# EAGLE board drinkshield02 (EAGLE 5.11)
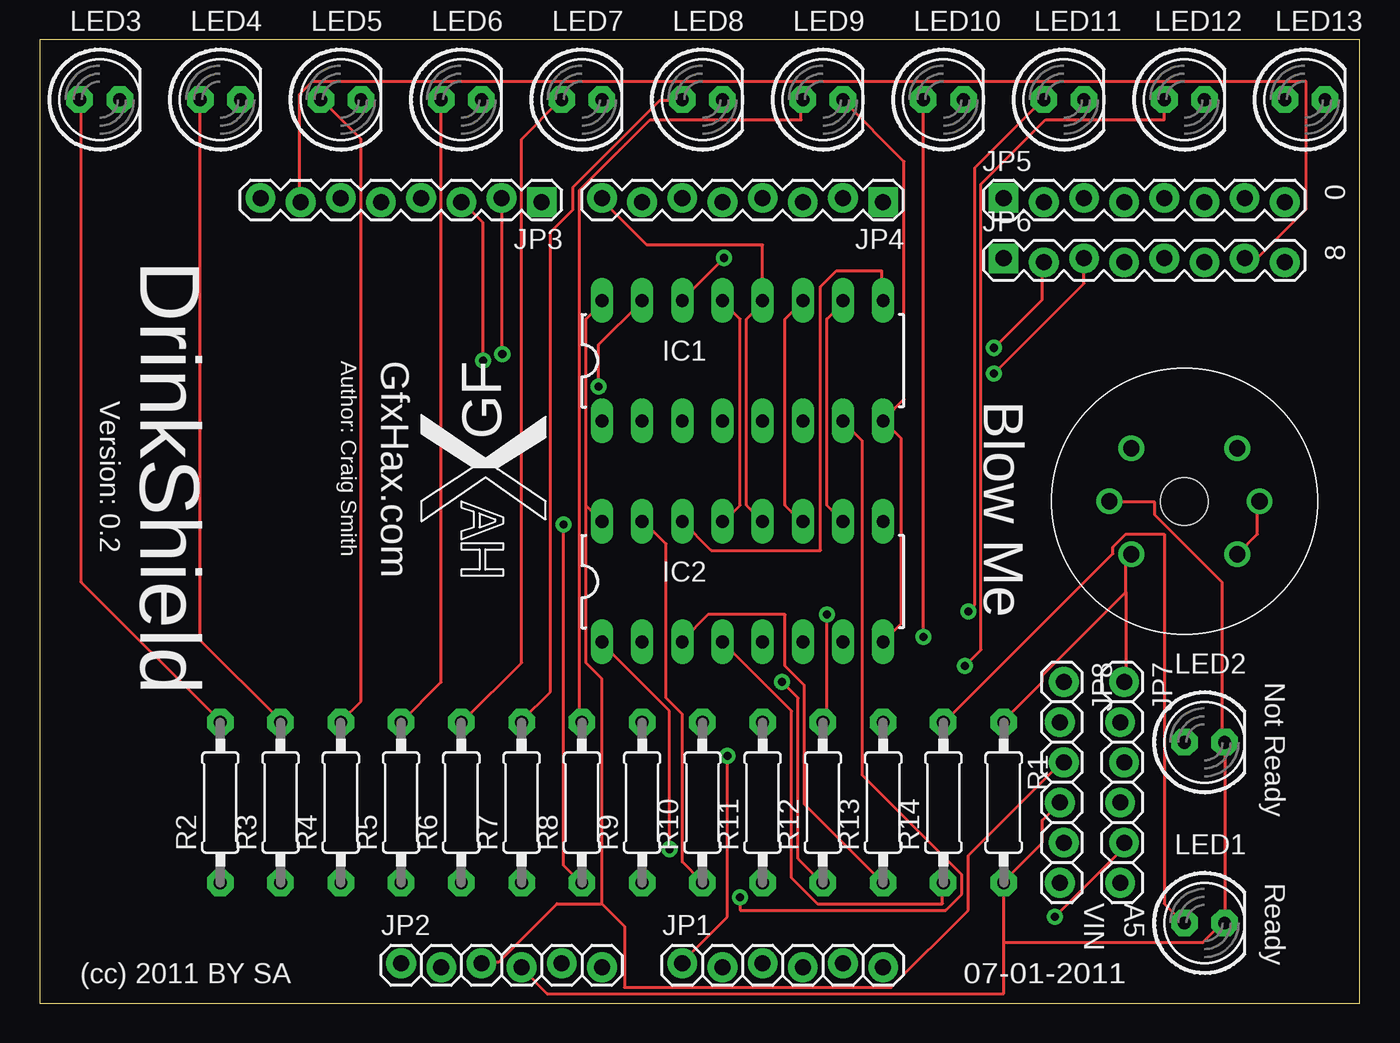
[diagram p0: board, top side]
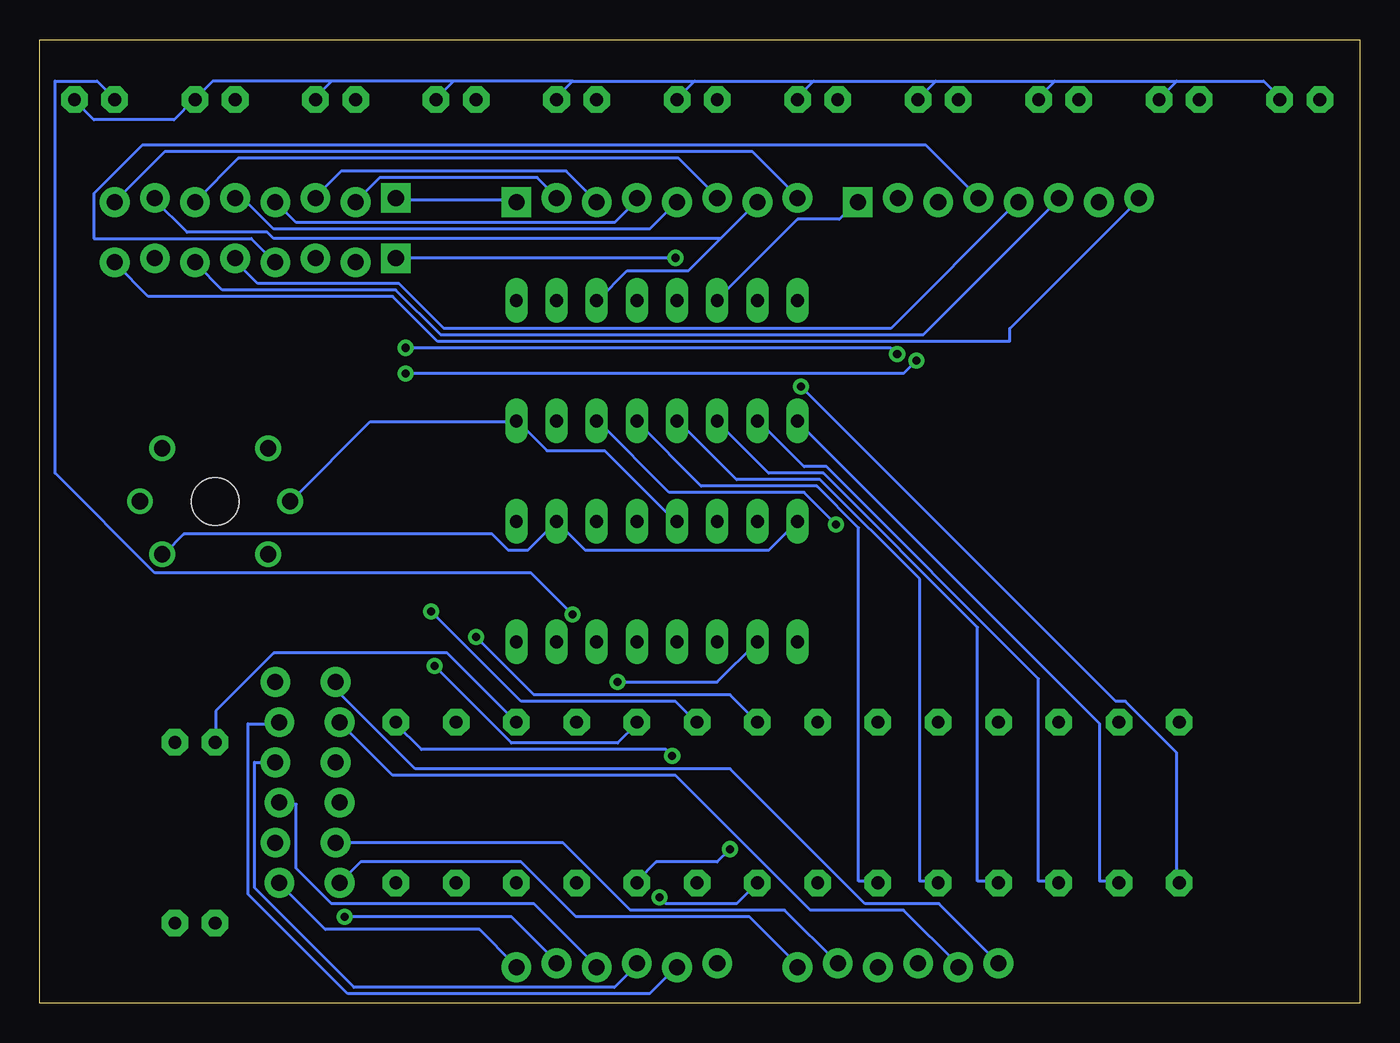
[diagram p1: board, bottom side, seen from below]

Size 83.49 x 60.95 mm. Coordinates in mm from the lower left corner, seen from the top.
Outline: 0,0 83.49,0 83.49,60.95 0,60.95 0,0
Copper layers (1*16): Top 0.035mm / dielectric 1.5mm / Bottom 0.035mm
Design rules "SparkFun": minimum track width 8mil, minimum drill 20mil, track to track 8mil, track to pad 8mil, pad to pad 8mil, via to via 8mil, smd to smd 8mil, copper to edge 10mil, drill to drill 8mil, minimum pad ring 12mil, minimum via ring 10mil, stop-mask expansion 4mil, vias tented up to drill 25mil, thermal gap 10mil

## Footprints (pad centres in the part's own frame; a part is rotated, then mirrored left to right if it is on the bottom)
DIL16 = drill 0.813 long: 1 -8.89,-3.81; 2 -6.35,-3.81; 3 -3.81,-3.81; 4 -1.27,-3.81; 5 1.27,-3.81; 6 3.81,-3.81; 7 6.35,-3.81; 8 8.89,-3.81; 9 8.89,3.81; 10 6.35,3.81; 11 3.81,3.81; 12 1.27,3.81; 13 -1.27,3.81; 14 -3.81,3.81; 15 -6.35,3.81; 16 -8.89,3.81
1X06_LOCK = drill 1.016 pad 1.88 round: 1 0,0; 2 2.54,-0.254; 3 5.08,0; 4 7.62,-0.254; 5 10.16,0; 6 12.7,-0.254
1X08_LOCK = drill 1.016 pad 1.88 square: 1 0,0.127 | drill 1.016 pad 1.88 round: 2 2.54,-0.127; 3 5.08,0.127; 4 7.62,-0.127; 5 10.16,0.127; 6 12.7,-0.127; 7 15.24,0.127; 8 17.78,-0.127
LED5MM = drill 0.813 pad 1.676 octagon: A -1.27,0; K 1.27,0
0207/10 = drill 0.813 pad 1.676 octagon: 1 -5.08,0; 2 5.08,0
MQ-3 = drill 1.016 round: A1 -3.35,3.35; A2 -3.35,-3.35; B1 3.35,3.35; B2 3.35,-3.35; HA -4.75,0; HB 4.75,0 | hole 3: 0,0

## Placement (x,y rotation side)
IC1  74LS595N  [DIL16]  44.45,40.64 0 top
IC2  74LS595N  [DIL16]  44.45,26.67 0 top
JP1  [1X06_LOCK]  40.64,2.54 0 top
JP2  [1X06_LOCK]  22.86,2.54 0 top
JP3  [1X08_LOCK]  31.75,50.8 180 top
JP4  [1X08_LOCK]  53.34,50.8 180 top
JP5  [1X08_LOCK]  60.96,50.8 0 top
JP6  [1X08_LOCK]  60.96,46.99 0 top
JP7  [1X06_LOCK]  68.58,20.32 270 top
JP8  [1X06_LOCK]  64.77,20.32 270 top
LED1  Ready  [LED5MM]  73.66,5.08 0 top
LED2  Not Ready  [LED5MM]  73.66,16.51 0 top
LED3  1  [LED5MM]  3.81,57.15 0 top
LED4  2  [LED5MM]  11.43,57.15 0 top
LED5  3  [LED5MM]  19.05,57.15 0 top
LED6  4  [LED5MM]  26.67,57.15 0 top
LED7  5  [LED5MM]  34.29,57.15 0 top
LED8  6  [LED5MM]  41.91,57.15 0 top
LED9  7  [LED5MM]  49.53,57.15 0 top
LED10  8  [LED5MM]  57.15,57.15 0 top
LED11  9  [LED5MM]  64.77,57.15 0 top
LED12  10  [LED5MM]  72.39,57.15 0 top
LED13  11  [LED5MM]  80.01,57.15 0 top
R1  220  [0207/10]  60.96,12.7 270 top
R2  220  [0207/10]  11.43,12.7 90 top
R3  220  [0207/10]  15.24,12.7 90 top
R4  220  [0207/10]  19.05,12.7 90 top
R5  220  [0207/10]  22.86,12.7 90 top
R6  220  [0207/10]  26.67,12.7 90 top
R7  220  [0207/10]  30.48,12.7 90 top
R8  220  [0207/10]  34.29,12.7 90 top
R9  220  [0207/10]  38.1,12.7 90 top
R10  220  [0207/10]  41.91,12.7 90 top
R11  220  [0207/10]  45.72,12.7 90 top
R12  220  [0207/10]  49.53,12.7 90 top
R13  220  [0207/10]  53.34,12.7 90 top
R14  220  [0207/10]  57.15,12.7 90 top
U1  GAS_SENSOR  [MQ-3]  72.39,31.75 180 top
U$1  [GFXHAX_LOGO]  26.67,40.64 270 top

## Library data of the parts
IC1 IC2 JP1-JP8 U1 = SparkFun
LED1-LED13 R1-R14 = adafruit
U$1 = gfxhax

## Nets
GND: IC1.8 IC1.13 IC2.8 IC2.13 JP2.4 JP8.4 LED1.K LED2.K LED3.K LED4.K LED5.K LED6.K LED7.K LED8.K LED9.K LED10.K LED11.K LED12.K LED13.K R1.2 U1.HB
N$1: LED13.A R12.2
N$2: LED12.A R11.2
N$3: LED11.A R10.2
N$4: LED10.A R9.2
N$5: LED9.A R8.2
N$6: LED8.A R7.2
N$7: LED7.A R6.2
N$8: LED6.A R5.2
N$9: LED5.A R4.2
N$10: LED4.A R3.2
N$11: LED3.A R2.2
N$12: IC2.15 R10.1
N$13: IC2.1 R11.1
N$14: IC1.1 R3.1
N$15: LED1.A R14.2
N$16: IC1.14 JP3.1 JP6.1
N$17: IC1.9 IC2.14
N$18: IC1.12 IC2.12 JP4.8 JP5.8
N$19: IC1.11 IC2.11 JP4.7 JP5.7
N$20: IC1.6 R8.1
N$21: LED2.A R13.2
N$22: JP4.1 JP5.1
N$23: IC1.15 R2.1
N$24: IC1.2 R4.1
N$25: IC1.3 R5.1
N$26: IC1.4 R6.1
N$27: IC1.5 R7.1
N$28: JP1.1 JP7.1 R1.1 U1.B1
N$29: IC1.7 R9.1
N$30: JP4.2 JP5.2
N$31: IC2.2 R12.1
N$32: IC2.3 R13.1
N$33: IC2.4 R14.1
N$34: JP4.3 JP5.3
N$35: JP4.4 JP5.4
N$36: JP4.5 JP5.5
N$37: JP4.6 JP5.6
N$38: JP3.2 JP6.2
N$39: JP3.3 JP6.3
N$40: JP3.4 JP6.4
N$41: JP3.5 JP6.5
N$42: JP3.6 JP6.6
N$43: JP3.7 JP6.7
N$44: JP3.8 JP6.8
N$45: JP1.6 JP7.6
N$46: JP1.5 JP7.5
N$47: JP1.4 JP7.4
N$48: JP1.3 JP7.3
N$49: JP1.2 JP7.2
N$50: JP2.6 JP8.6
N$51: JP2.5 JP8.5
N$52: JP2.2 JP8.2
N$53: JP2.1 JP8.1
VCC: IC1.10 IC1.16 IC2.10 IC2.16 JP2.3 JP8.3 U1.A1 U1.HA

## Tracks (layer width: path | path; a pad name or v marks a point on that pad's centre or on a via)
GND
  Top 0.203: IC1.13 43.28,44.3 44.3,43.28 44.3,31.5 43.28,30.48 IC2.13 | IC2.8 54.46,23.98 54.46,35.76 53.44,36.78 IC1.8 53.44,36.98 54.66,38.2 54.66,53.24 50.8,57.1 LED9.K | JP8.4 63.4,11.58 63.4,10.16 60.96,7.72 R1.2 60.96,3.86 | 60.96,3.86 60.96,0.61 32.11,0.61 30.48,2.23 JP2.4 | 60.96,3.86 73.56,3.86 74.78,5.08 LED1.K 74.98,5.08 74.98,16.46 LED2.K 74.78,16.66 74.78,26.62 70.51,30.89 70.51,31.7 67.67,31.7 U1.HB
  Bottom 0.203: 11.58,58.32 6.1,58.32 5.08,57.3 LED3.K | 11.58,58.32 12.6,57.3 LED4.K | 19.3,58.32 20.32,57.3 LED5.K | 19.3,58.32 11.58,58.32 | 26.82,58.32 27.84,57.3 LED6.K | 26.82,58.32 19.3,58.32 | 34.54,58.32 35.56,57.3 LED7.K | 34.54,58.32 26.82,58.32 | 42.06,58.32 43.08,57.3 LED8.K | 42.06,58.32 34.54,58.32 | 49.78,58.32 50.8,57.3 LED9.K | 49.78,58.32 42.06,58.32 | 57.3,58.32 58.32,57.3 LED10.K | 49.78,58.32 57.3,58.32 | 65.02,58.32 66.04,57.3 LED11.K | 57.3,58.32 65.02,58.32 | 65.02,58.32 72.54,58.32 73.56,57.3 LED12.K 73.76,57.1 74.98,55.88 80.06,55.88 81.28,57.1 LED13.K | IC2.13 43.28,30.48 47.75,34.95 51.41,34.95 53.24,36.78 IC1.8 53.44,36.78 62.59,36.78 67.46,31.9 U1.HB
N$1  (via drill 0.51)
  Top 0.203: v49.78,24.59 49.78,18.09 49.58,17.88 R12.2
  Bottom 0.203: v49.78,24.59 52.43,27.23 76.2,27.23 82.5,33.53 82.5,58.32 79.86,58.32 78.84,57.3 LED13.A
N$2  (via drill 0.51)
  Top 0.203: v58.52,21.34 59.54,22.35 59.54,51.82 63.6,55.88 71.12,55.88 LED12.A
  Bottom 0.203: v58.52,21.34 53.65,16.46 46.94,16.46 45.72,17.68 R11.2
N$3  (via drill 0.51)
  Top 0.203: v58.73,24.79 59.13,25.2 59.13,52.83 63.4,57.1 LED11.A
  Bottom 0.203: v58.73,24.79 53.03,19.1 43.28,19.1 42.06,17.88 R10.2
N$4  (via drill 0.51)
  Top 0.203: v55.88,23.16 LED10.A
  Bottom 0.203: v55.88,23.16 52.22,19.51 39.83,19.51 R9.2
N$5
  Top 0.203: R8.2 34.14,17.88 34.14,51.41 38.61,55.88 48.16,55.88 48.16,57.1 LED9.A
N$6
  Top 0.203: R7.2 30.48,17.88 32.31,19.71 32.31,48.77 33.73,50.19 33.73,51.61 39.22,57.1 40.64,57.1 LED8.A
N$7
  Top 0.203: R6.2 26.82,17.88 30.48,21.54 30.48,54.66 32.92,57.1 LED7.A
N$8
  Top 0.203: R5.2 25.4,20.32 LED6.A
N$9
  Top 0.203: R4.2 19.1,17.88 20.32,19.1 20.32,54.66 17.88,57.1 LED5.A
N$10
  Top 0.203: R3.2 15.24,17.88 10.16,22.96 LED4.A
N$11
  Top 0.203: R2.2 11.38,17.88 2.64,26.62 2.64,57.1 LED3.A
N$12
  Top 0.203: IC2.15 38.2,30.48 39.62,29.06 39.62,19.3 40.64,18.29 40.64,8.94 41.86,7.72 R10.1
N$13  (via drill 0.51)
  Top 0.203: v39.83,9.75 39.83,18.49 35.56,22.76 IC2.1
  Bottom 0.203: v39.83,9.75 40.64,8.94 44.5,8.94 45.72,7.72 R11.1
N$14
  Bottom 0.203: IC1.1 35.56,36.78 16.46,17.68 16.46,7.72 15.24,7.72 R3.1
N$15
  Top 0.203: R14.2 57.3,17.88 67.87,28.45 67.87,28.85 68.68,29.67 71.12,29.67 71.12,6.3 72.34,5.08 LED1.A
N$16  (via drill 0.51)
  Top 0.203: v43.28,47.14 40.64,44.5 IC1.14
  Bottom 0.203: IC1.14 40.64,44.5 35.56,49.58 32.92,49.58 31.9,50.6 JP3.1 | v43.28,47.14 60.96,47.14 JP6.1
N$17
  Top 0.203: IC2.14 42.47,28.65 49.38,28.65 49.38,45.31 50.39,46.33 53.24,46.33 53.24,44.5 IC1.9
N$18
  Top 0.203: IC2.12 44.7,31.5 44.7,43.28 45.72,44.3 IC1.12 45.72,47.95 38.41,47.95 35.56,50.8 JP4.8
  Bottom 0.203: JP5.8 78.64,50.8 75.59,53.85 38.41,53.85 35.56,51 JP4.8
N$19
  Top 0.203: IC2.11 48.16,30.48 47.14,31.5 47.14,43.28 48.16,44.3 IC1.11
  Bottom 0.203: 40.44,48.36 42.47,46.33 46.33,46.33 48.16,44.5 IC1.11 | 40.44,48.36 38.2,50.6 JP4.7 | 40.44,48.36 68.68,48.36 69.09,48.77 74.17,48.77 76.2,50.8 JP5.7
N$20  (via drill 0.51)
  Top 0.203: v33.12,30.28 33.12,8.74 34.14,7.72 R8.1
  Bottom 0.203: v33.12,30.28 35.15,32.31 43.69,32.31 48.16,36.78 IC1.6
N$21
  Bottom 0.203: R13.2 57.71,22.15 68.68,22.15 72.34,18.49 72.34,16.66 LED2.A
N$22
  Bottom 0.203: JP4.1 53.44,50.8 60.96,50.8 JP5.1
N$23  (via drill 0.51)
  Top 0.203: v35.36,39.01 35.36,41.66 38,44.3 IC1.15
  Bottom 0.203: v35.36,39.01 15.44,19.1 14.83,19.1 11.58,15.85 11.58,7.72 R2.1
N$24
  Bottom 0.203: IC1.2 38,36.78 35.15,33.93 33.73,33.93 20.32,20.52 20.32,7.72 19.1,7.72 R4.1
N$25
  Bottom 0.203: IC1.3 40.64,36.78 37.39,33.53 33.93,33.53 24.18,23.77 24.18,7.72 22.96,7.72 R5.1
N$26
  Bottom 0.203: IC1.4 43.08,36.78 39.42,33.12 34.14,33.12 27.84,26.82 27.84,7.72 26.82,7.72 R6.1
N$27
  Bottom 0.203: IC1.5 45.72,36.78 41.66,32.72 34.34,32.72 31.7,30.07 31.7,7.72 30.48,7.72 R7.1
N$28  (via drill 0.51)
  Top 0.203: 68.68,26.01 68.68,20.32 JP7.1 | 68.68,26.01 68.68,28.04 U1.B1 | 68.68,26.01 63.4,20.73 63.4,20.32 60.96,17.88 R1.1 | v43.48,15.65 43.48,5.49 40.64,2.64 JP1.1
  Bottom 0.203: v43.48,15.65 43.89,16.05 59.33,16.05 60.96,17.68 R1.1
N$29  (via drill 0.51)
  Top 0.203: v44.3,6.71 44.3,5.89 57.3,5.89 58.32,6.91 58.32,8.13 52.02,14.43 52.02,35.56 50.8,36.78 IC1.7
  Bottom 0.203: v44.3,6.71 43.89,6.3 39.42,6.3 R9.1
N$30
  Bottom 0.203: JP4.2 50.8,51 52.02,52.22 61.98,52.22 63.4,50.8 JP5.2
N$31  (via drill 0.51)
  Top 0.203: v46.94,20.32 47.95,19.3 47.95,9.14 49.38,7.72 R12.1
  Bottom 0.203: v46.94,20.32 40.64,20.32 IC2.2
N$32
  Top 0.203: IC2.3 40.64,22.96 42.27,24.59 47.14,24.59 47.14,21.34 48.36,20.12 48.36,12.6 R13.1
N$33
  Top 0.203: IC2.4 47.55,18.49 47.55,7.92 49.17,6.3 57.1,6.3 57.1,7.52 R14.1
N$34
  Bottom 0.203: JP4.3 48.36,50.8 50.19,52.63 64.41,52.63 66.04,51 JP5.3
N$35
  Bottom 0.203: JP4.4 45.72,50.8 47.14,49.38 67.26,49.38 68.48,50.6 JP5.4
N$36
  Bottom 0.203: JP4.5 43.28,50.6 44.91,48.97 68.68,48.97 70.51,50.8 71.12,50.8 JP5.5
N$37
  Bottom 0.203: JP4.6 40.64,51 43.08,53.44 70.92,53.44 73.56,50.8 JP5.6
N$38  (via drill 0.51)
  Top 0.203: v29.26,41.05 29.26,50.8 JP3.2 | v60.35,41.45 63.4,44.5 63.4,46.74 JP6.2
  Bottom 0.203: v29.26,41.05 29.67,41.45 v60.35,41.45
N$39  (via drill 0.51)
  Top 0.203: v28.04,40.64 28.04,49.38 26.82,50.6 JP3.3 | v60.35,39.83 66.04,45.52 JP6.3
  Bottom 0.203: v28.04,40.64 28.85,39.83 v60.35,39.83
N$40
  Bottom 0.203: JP3.4 24.18,51 27.43,54.25 77.01,54.25 80.06,51.21 80.06,48.36 70.1,48.36 68.68,46.94 JP6.4
N$41
  Bottom 0.203: JP3.5 21.74,50.6 29.67,42.67 57.91,42.67 60.76,45.52 69.7,45.52 71.12,46.94 JP6.5
N$42
  Bottom 0.203: JP3.6 19.1,50.8 27.64,42.27 58.12,42.27 60.96,45.11 71.93,45.11 73.56,46.74 JP6.6
N$43
  Top 0.203: JP3.7 16.46,50.8 16.46,57.51 17.27,58.32 80.06,58.32 80.06,50.19 77.01,47.14 76.2,47.14 JP6.7
N$44
  Bottom 0.203: JP3.8 14.02,50.8 22.15,42.67 22.15,41.86 58.32,41.86 61.16,44.7 76.61,44.7 78.64,46.74 JP6.8
N$45
  Bottom 0.203: JP1.6 53.44,2.44 55.68,4.67 65.43,4.67 68.28,7.52 JP7.6
N$46  (via drill 0.51)
  Top 0.203: v64.21,5.49 68.48,9.75 68.48,10.16 JP7.5
  Bottom 0.203: v64.21,5.49 53.65,5.49 50.8,2.64 JP1.5
N$47
  Bottom 0.203: JP1.4 48.36,2.44 52.22,6.3 65.02,6.3 67.26,8.53 67.26,12.6 68.28,12.6 JP7.4
N$48
  Bottom 0.203: JP1.3 45.72,2.44 47.14,1.02 63.6,1.02 69.9,7.32 69.9,15.24 JP7.3
N$49
  Bottom 0.203: JP1.2 43.28,2.23 44.91,0.61 64.01,0.61 70.31,6.91 70.31,17.68 68.48,17.68 JP7.2
N$50
  Bottom 0.203: JP2.6 35.56,2.44 38.61,5.49 49.58,5.49 53.03,8.94 63.2,8.94 JP8.6
N$51
  Bottom 0.203: JP2.5 36.37,5.89 46.13,5.89 50.39,10.16 JP8.5
N$52
  Bottom 0.203: JP2.2 25.4,2.44 28.85,5.89 34.75,5.89 43.28,14.43 61.16,14.43 JP8.2
N$53
  Bottom 0.203: JP2.1 26.62,6.3 31.29,6.3 39.83,14.83 59.74,14.83 64.62,19.71 64.62,20.32 JP8.1
VCC
  Top 0.203: U1.A1 75.79,28.45 77.01,29.67 77.01,31.7 U1.HA | IC2.10 49.78,31.5 49.78,43.28 50.8,44.3 IC1.10 | 34.54,31.5 IC2.16 | 34.54,31.5 34.54,43.28 35.56,44.3 IC1.16 | 35.56,6.3 32.72,6.3 29.06,2.64 28.04,2.64 JP2.3 | 35.56,6.3 35.56,20.52 34.54,21.54 34.54,31.5 | 35.56,6.3 36.98,4.88 36.98,1.02 53.85,1.02 58.73,5.89 58.73,9.35 64.62,15.24 JP8.3
  Bottom 0.203: U1.A1 75.59,28.45 74.37,29.67 54.86,29.67 53.85,28.65 52.63,28.65 IC2.10 48.97,28.65 37.39,28.65 IC2.16

## Text on the board
tPlace: 0 | DrinkShield | 8 | Author: Craig Smith | GfxHax.com | Version: 0.2 | Blow Me | Not Ready | Ready | VIN | A5 | (cc) 2011 BY SA | 07-01-2011